# Altium PCB HLK-TX510_2.8_KIT_V1.1.PcbDoc (part 2 of 2)
Units mm, origin at the board's own origin, x right, y up, seen from the top; angles counter-clockwise.
Board outline 64 x 95.97 mm, 4 copper layers (Top Layer, GND, PWR, Bottom Layer), stack 0.537 mm thick; 97 components, 82 nets, 456 pads, 366 vias.
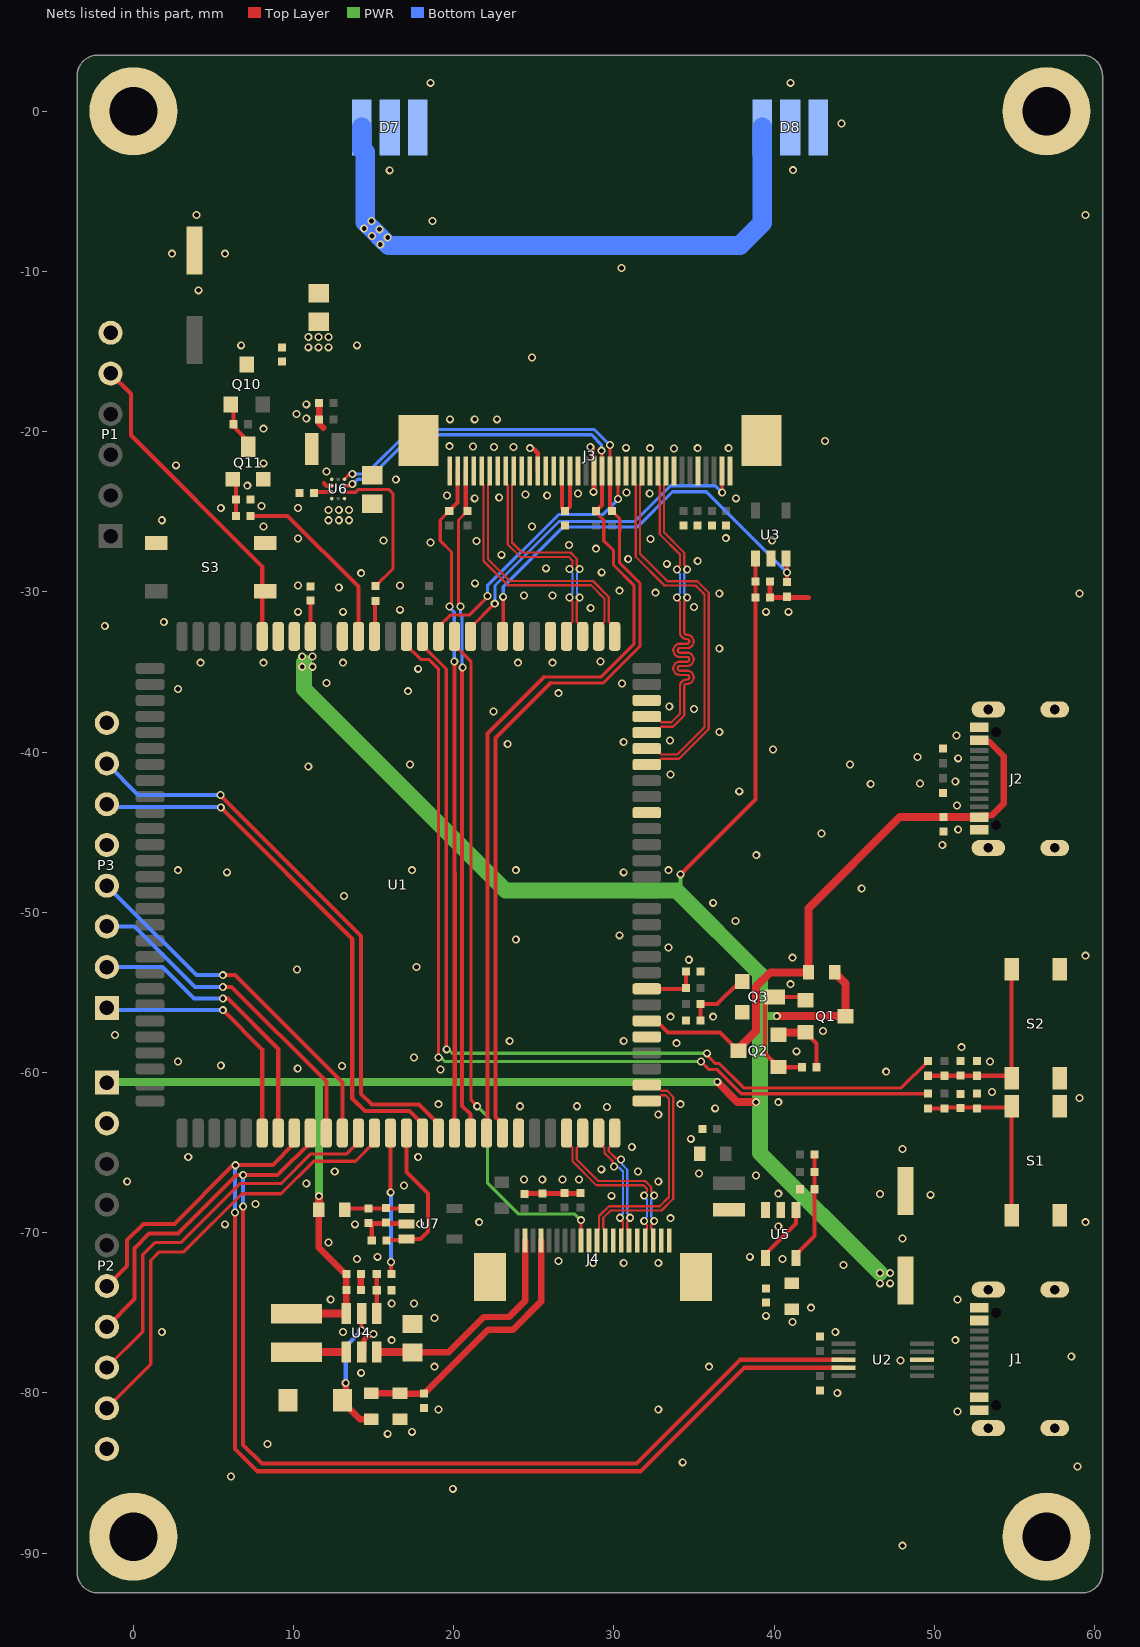
[diagram p4: the nets of this part, all layers, seen from the top]

## Via types
v1: diameter 0.5, hole 0.3, Top Layer to Bottom Layer, tented both sides, 366 vias

## Nets (pads, with @x,y where several pads share a name; then routed paths per layer and width w, separated by ;. In a path a pad name is that pad's centre, name@x,y a point inside that pad or via, vN(x,y) a via of type N, cw(c..) or ccw(c..) an arc to the next point about the centre after c; other vN are vias at no path point) (continued)
GND: C1.2 C2.1 C3.2 C4.2 C5.1 C6.2 C7.2 C8.2 C9.2 C10.2 C11.2 C12.2 C13.2 C14.2 C15.2 C16.2 C17.2 C18.2 C19.2 C20.2 C21.2 C22.2 C24.2 C25.2 C26.2 C27.2 C28.2 C29.2 C30.2 C31.2 C32.2 C33.2 D1.1 D2.1 D3.1 D4.1 D5.1 D7.0 D7.K D8.0 D8.K J1.1 J1.2 J1.3 J1.4 J1.A1B12 J1.B1A12 J2.1 J2.2 J2.3 J2.4 J2.A1B12 J2.B1A12 J3.1 J3.5 J3.8 J3.11 J3.14 J3.18 J3.20 J3.25 J3.26 J3.27 J3.30 J3.33 J3.36 J3.37 J3.38 J4.10 J4.13 J4.16 J4.19 J4.20 J4.21 J4.22 P1.6 P2.2 P2.10 P3.5 P3.8 pad.0 Q3.E Q11.E R5.1 R6.1 R10.2 R12.1 R13.2 R21.1 R26.1 R30.2 S1.2 S2.2 S3.1 U1.50 U1.61 U1.75 U1.82 U1.89 U1.91 U1.102 U1.106 U2.3 U3.2 U4.2 U5.2 U6.A1 U7.2 | length 18.7
  Top Layer w0.3: U4.2@14.25,-77.449 14.4,-77.299 14.4,-76.676 14.621,-76.454 14.732,-76.454 ; C17.2@14.681,-69.386 C17.2@14.71,-69.415 ; R26.1@14.884,-70.485 14.884,-69.589 C17.2@14.71,-69.415 ; U7.2@17.042,-69.444 17.013,-69.415 C17.2@14.71,-69.415 ; C32.2@24.409,-67.571 24.435,-67.546 C33.2@25.527,-67.546 27.889,-67.546 C26.2@27.915,-67.52 ; 25.015,-21.101 25.248,-21.334 J3.25@25.248,-22.453 ; v1@28.677,-20.98 28.677,-21.488 28.748,-21.559 J3.18@28.748,-22.453 28.748,-23.729 v1(28.727,-23.749) ; C8.2@39.736,-29.34 C7.2@39.736,-30.356 42.161,-30.356 42.164,-30.353
  Top Layer w0.4: C28.2@11.595,-18.215 C29.2@11.595,-19.231 11.595,-19.477 11.862,-19.744 ; C11.2@14.197,-73.587 C6.2@14.197,-72.571
  other v1: 48.006,-89.535 19.939,-85.979 6.096,-85.217 58.928,-84.582 34.29,-84.328 8.382,-83.185 15.875,-82.55 17.399,-82.423 51.435,-81.153 19.05,-81.026 32.766,-81.026 43.942,-80.01 14.224,-78.74 18.796,-78.359 35.941,-78.359 47.879,-77.978 58.547,-77.724 16.129,-76.708 51.308,-76.708 14.986,-76.327 1.778,-76.2 13.081,-76.2 43.815,-76.2 41.148,-75.565 18.796,-75.311 39.497,-75.184 42.291,-74.676 16.129,-74.422 17.526,-74.422 12.319,-74.168 51.435,-74.168 44.323,-72.009 28.702,-71.882 30.607,-71.882 32.766,-71.882 26.543,-71.755 13.97,-71.628 40.513,-71.628 15.24,-71.501 38.481,-71.501 12.192,-70.612 48.006,-70.358 40.259,-69.596 5.715,-69.469 13.843,-69.469 17.882,-69.444 21.59,-69.342 59.436,-69.342 33.528,-69.088 7.62,-68.199 29.845,-67.691 49.759,-67.63 46.609,-67.58 40.259,-67.564 16.891,-67.056 10.795,-66.929 -0.381,-66.802 32.766,-66.802 24.384,-66.675 25.527,-66.675 26.797,-66.675 27.813,-66.675 38.862,-66.421 35.306,-66.294 12.573,-66.167 31.496,-66.167 29.21,-66.04 3.429,-65.278 17.78,-65.278 48.006,-64.77 31.115,-64.643 34.798,-64.135 32.766,-62.611 36.322,-62.23 29.565,-62.143 24.13,-62.103 27.686,-62.103 19.05,-61.976 34.163,-61.976 40.259,-61.849 59.055,-61.595 53.594,-61.214 46.99,-59.944 19.177,-59.817 10.262,-59.741 13.03,-59.588 5.461,-59.563 2.794,-59.309 53.467,-59.309 17.526,-59.055 41.402,-58.674 51.689,-58.42 33.909,-58.166 23.495,-58.039 30.607,-58.039 -1.143,-57.658 43.053,-57.404 33.528,-56.515 36.195,-56.515 41.021,-54.483 10.211,-53.569 17.678,-53.416 34.671,-52.959 41.148,-52.832 59.436,-52.705 33.401,-52.197 23.876,-51.689 30.353,-51.435 37.592,-50.546 36.195,-49.403 13.157,-48.971 45.466,-48.514 5.842,-47.498 30.607,-47.498 2.794,-47.371 17.399,-47.371 23.876,-47.371 33.401,-47.371 38.887,-46.431 50.495,-45.796 42.951,-45.085 51.486,-44.831 51.41,-43.332 37.821,-42.443 46.025,-41.986 49.098,-41.961 51.308,-41.834 33.528,-41.402 10.922,-40.894 17.272,-40.767 44.729,-40.767 51.486,-40.386 48.946,-40.31 39.929,-39.827 23.368,-39.497 30.607,-39.37 33.503,-39.268 51.384,-38.964 36.576,-38.735 22.479,-37.465 35.001,-37.313 33.452,-37.16 26.543,-36.322 17.145,-36.195 2.794,-36.068 30.505,-35.712 12.065,-35.687 17.78,-34.798 4.191,-34.417 8.128,-34.417 13.081,-34.417 24.003,-34.417 26.162,-34.417 29.159,-34.341 36.576,-33.528 -1.778,-32.131 1.905,-31.877 10.287,-31.242 13.081,-31.242 39.497,-31.242 40.894,-31.242 16.637,-31.115 28.55,-31.013 35.001,-30.937 24.384,-30.226 26.162,-30.226 36.576,-30.099 59.055,-30.099 32.588,-30.048 30.353,-29.921 12.827,-29.718 10.287,-29.591 16.637,-29.591 21.336,-29.464 14.224,-28.829 29.235,-28.778 25.756,-28.524 33.299,-28.245 35.23,-28.067 30.886,-27.94 22.987,-27.686 28.88,-27.305 27.203,-27.076 18.542,-26.924 21.417,-26.817 15.621,-26.797 39.878,-26.797 32.283,-26.695 10.287,-26.67 36.982,-26.645 8.128,-25.908 24.892,-25.908 1.778,-25.527 5.461,-24.765 10.287,-24.765 8.001,-24.638 21.311,-24.155 37.617,-24.155 22.835,-24.105 19.583,-23.978 25.832,-23.978 24.486,-23.927 27.762,-23.851 32.233,-23.851 30.785,-23.8 7.112,-23.368 16.383,-22.987 12.065,-22.479 2.667,-22.098 8.128,-21.971 33.757,-21.057 24.765,-21.031 32.258,-21.031 35.23,-21.031 37.16,-21.031 30.759,-21.006 22.504,-20.955 23.724,-20.955 28.524,-20.955 21.209,-20.93 19.736,-20.904 43.18,-20.574 8.128,-19.812 19.761,-19.228 21.311,-19.228 22.708,-19.228 10.795,-19.177 10.185,-18.898 10.795,-18.288 24.892,-15.367 6.731,-14.605 13.97,-14.605 4.064,-11.176 30.48,-9.779 2.413,-8.89 5.715,-8.89 18.669,-6.858 3.937,-6.477 59.436,-6.477 16.002,-3.683 41.174,-3.678 44.196,-0.762 18.542,1.778 41.021,1.778
I2C0_SCL: J3.35 R25.2 U1.46 | length 42.2
  Top Layer w0.2: R25.2@19.716,-24.946 19.152,-25.51 19.152,-26.797 19.863,-27.508 v1@19.863,-30.861
  Top Layer w0.254: R25.2@19.716,-24.946 20.248,-24.414 J3.35@20.248,-22.453 ; v1(20.037,-34.341) 20.037,-47.535 20.062,-47.561 20.062,-60.66 20.037,-60.685 20.037,-63.766 U1.46@20.047,-63.776
  Bottom Layer w0.2: v1(19.736,-30.912) 19.736,-30.963 20.037,-31.263 v1(20.037,-34.341)
I2C0_SDA: J3.34 R24.2 U1.47 | length 41.9
  Top Layer w0.2: v1@20.295,-30.861 20.295,-25.51 R24.2@20.859,-24.946 ; v1@20.523,-34.823 20.594,-34.823 v1@20.634,-34.783
  Top Layer w0.254: v1@20.523,-34.823 20.523,-62.078 21.047,-62.601 U1.47@21.047,-63.776 ; J3.34@20.748,-22.453 20.748,-24.835 R24.2@20.859,-24.946
  Bottom Layer w0.2: v1@20.479,-30.969 v1(20.422,-30.912) 20.422,-31.483 20.523,-31.585 20.523,-34.691 v1(20.558,-34.727)
I2C1_SCL: J3.17 R23.2 U1.48 U6.B3 | length 67.6
  Top Layer w0.2: U6.B3@13.181,-23.374 13.566,-23.374 v1(13.67,-23.269) ; 25.637,-35.306 29.21,-35.306 31.242,-33.274 31.242,-29.591 29.972,-28.321 29.972,-27.407 29.368,-26.802 29.368,-25.523 28.872,-25.028 R23.2@28.872,-24.946 ; v1(29.215,-21.187) 29.248,-21.219 J3.17@29.248,-22.453
  Top Layer w0.254: U1.48@22.047,-63.776 22.094,-63.728 22.094,-38.849 25.637,-35.306 ; R23.2@28.872,-24.946 29.248,-24.57 J3.17@29.248,-22.453
  Bottom Layer w0.2: v1(13.67,-23.269) 13.71,-23.269 14.018,-22.961 14.669,-22.961 17.438,-20.193 28.603,-20.193 29.215,-20.806 v1(29.215,-21.187)
I2C1_SDA: J3.16 R22.2 U1.49 U6.A3 | length 67
  Top Layer w0.2: U6.A3@13.181,-22.974 13.521,-22.634 v1(13.67,-22.634) ; 26.039,-35.687 29.337,-35.687 31.623,-33.401 31.623,-29.464 30.353,-28.194 30.353,-26.212 30.357,-26.208 30.357,-25.512 30.353,-25.509 30.353,-25.423 R22.2@29.876,-24.946 ; J3.16@29.748,-22.453 J3.16@29.748,-22.453 v1(29.749,-20.831)
  Top Layer w0.254: U1.49@22.885,-63.068 22.606,-62.789 22.606,-39.124 26.039,-35.691 ; R22.2@29.748,-24.932 J3.16@29.748,-22.453
  Bottom Layer w0.2: v1(13.67,-22.634) 14.534,-22.634 17.306,-19.863 28.78,-19.863 v1(29.749,-20.831)
I2C3_SCL: P3.2 U1.35 | length 18.1
  Top Layer w0.254: v1(5.588,-55.38) 5.901,-55.38 9.047,-58.526 U1.35@9.047,-63.776
  Bottom Layer w0.254: P3.2@-1.651,-53.416 1.829,-53.416 3.793,-55.38 v1(5.588,-55.38)
I2C3_SDA: P3.1 U1.34 | length 15.9
  Top Layer w0.254: v1(5.588,-56.109) 8.047,-58.567 U1.34@8.047,-63.776
  Bottom Layer w0.254: P3.1@-1.651,-55.956 -1.499,-56.109 v1@5.537,-56.109
IR_RST: J3.15 U1.96 | length 17.3
  Top Layer w0.2: U1.96@19.047,-32.776 19.047,-32.185 19.786,-31.445 20.98,-31.445 22.098,-30.328 v1(22.098,-30.251) ; J3.15@30.248,-22.453 30.248,-24.2 v1(30.257,-24.209)
  Bottom Layer w0.2: v1(22.098,-30.251) 22.098,-29.614 26.541,-25.171 29.294,-25.171 v1(30.257,-24.209)
JTAG_NRST: P1.5 S3.2@8.226,-29.948 U1.107 | length 20.3
  Top Layer w0.254: P1.5@-1.417,-16.361 -0.147,-17.631 -0.147,-20.221 8.047,-28.415 8.047,-30.202 U1.107@8.047,-32.776
LCD_BL_EN: R9.1 U1.42 | length 8.8
  Top Layer w0.254: U1.42@16.047,-63.776 16.056,-63.785 16.056,-67.466 v1(16.066,-67.475) ; v1(16.078,-71.831) 16.093,-71.846 16.093,-72.555 R9.1@16.109,-72.571
  Bottom Layer w0.254: v1(16.066,-67.475) 16.072,-67.482 16.072,-71.825 v1(16.078,-71.831)
LCD_RESET: J4.9 U1.95 | length 43
  Top Layer w0.2: U1.95@20.047,-32.776 20.047,-33.331 21.082,-34.366 21.082,-61.722 v1(21.463,-62.103) ; v1(27.94,-69.215) 27.945,-69.22 27.945,-70.482 J4.9@27.95,-70.487
  PWR w0.2: v1(21.463,-62.103) 22.098,-62.738 22.098,-66.878 24.054,-68.834 27.559,-68.834 v1(27.94,-69.215)
LED+: C18.1 C19.1 J4.4 L1.1 | length 16.8
  Top Layer w0.4: L1.1@14.85,-80.014 C18.1@16.653,-80.014 ; C18.1@16.682,-80.043 C19.1@18.148,-80.043 22.143,-76.048 23.698,-76.048 25.451,-74.295 J4.4@25.451,-70.487
LED-: J4.2 R13.1 U4.3 | length 14.4
  Top Layer w0.4: R13.1@17.424,-77.47 19.66,-77.47 21.869,-75.26 23.444,-75.26 24.451,-74.254 J4.2@24.451,-70.487
  Top Layer w0.5: U4.3@15.2,-77.449 R13.1@17.424,-77.449
MIPI0_CLKN: J3.32 U1.86 | length 16.7
  Top Layer w0.14: J3.32@21.748,-22.453 21.748,-23.203 21.864,-23.319 21.864,-28.073 23.382,-29.591 28.575,-29.591 29.413,-30.429 29.413,-31.864 29.047,-32.23 U1.86@29.047,-32.776
MIPI0_CLKP: J3.31 U1.85 | length 16.7
  Top Layer w0.14: J3.31@22.225,-22.476 J3.31@22.248,-22.453 22.248,-23.203 22.131,-23.319 22.131,-27.963 23.492,-29.324 28.686,-29.324 29.68,-30.319 29.68,-31.864 30.047,-32.23 U1.85@30.047,-32.776
MIPI0_DATAN0: J3.29 U1.88 | length 14.3
  Top Layer w0.14: J3.29@23.248,-22.453 23.248,-23.203 23.364,-23.319 23.364,-27.033 24.144,-27.813 27.178,-27.813 27.413,-28.048 27.413,-28.313 27.233,-28.493 v1(27.233,-28.575) ; U1.88@27.047,-32.776 27.047,-32.23 27.413,-31.864 27.413,-30.63 27.233,-30.45 v1(27.233,-30.353)
  Bottom Layer w0.14: v1(27.233,-30.353) 27.233,-30.271 27.413,-30.091 27.413,-28.837 27.233,-28.657 v1(27.233,-28.575)
MIPI0_DATAP0: J3.28 U1.87 | length 14.3
  Top Layer w0.14: J3.28@23.748,-22.453 23.748,-23.203 23.631,-23.319 23.631,-26.923 24.254,-27.546 27.289,-27.546 27.68,-27.938 27.68,-28.313 27.86,-28.493 v1(27.86,-28.575) ; v1(27.86,-30.353) 27.86,-30.45 27.68,-30.63 27.68,-31.864 28.047,-32.23 U1.87@28.047,-32.776
  Bottom Layer w0.14: v1(27.86,-30.353) 27.86,-30.265 27.686,-30.091 27.686,-28.837 27.86,-28.663 v1(27.86,-28.575)
MIPI1_CLKN: J3.13 U1.79 | length 23.4
  Top Layer w0.14: J3.13@31.248,-22.453 31.248,-23.203 31.364,-23.319 31.364,-27.808 33.158,-29.602 35.088,-29.602 35.357,-29.87 35.649,-30.162 35.649,-38.443 33.95,-40.142 33.125,-40.142 32.959,-40.142 32.592,-39.776 U1.79@32.047,-39.776
MIPI1_CLKP: J3.12 U1.78 | length 23.8
  Top Layer w0.14: J3.12@31.748,-22.453 31.748,-23.203 31.631,-23.319 31.631,-27.618 33.348,-29.335 35.199,-29.335 35.731,-29.867 35.916,-30.052 35.916,-38.554 34.06,-40.409 33.235,-40.409 32.959,-40.409 32.592,-40.776 U1.78@32.047,-40.776
MIPI1_DATAN0: J3.10 U1.81 | length 22.2
  Top Layer w0.14: U1.81@32.047,-37.776 32.592,-37.776 32.959,-38.142 33.579,-38.142 34.125,-37.596 34.125,-36.651 34.125,-35.888 cw(c34.538,-35.888) 34.538,-35.475 34.563,-35.475 ccw(c34.563,-35.328) 34.563,-35.182 34.119,-35.182 cw(c34.119,-34.769) 34.119,-34.356 34.563,-34.356 ccw(c34.563,-34.21) 34.563,-34.063 34.119,-34.063 cw(c34.119,-33.65) 34.119,-33.237 34.563,-33.237 ccw(c34.563,-33.091) 34.563,-32.945 34.538,-32.945 cw(c34.538,-32.531) 34.125,-32.531 34.125,-31.237 34.125,-30.615 33.945,-30.435 v1(33.945,-30.353) ; J3.10@32.748,-22.453 32.748,-23.203 32.864,-23.319 32.864,-26.402 34.125,-27.663 34.125,-28.323 33.945,-28.503 v1(33.945,-28.6)
  Bottom Layer w0.14: v1(33.945,-30.353) 33.945,-30.271 34.125,-30.091 34.125,-28.862 33.945,-28.682 v1(33.945,-28.6)
MIPI1_DATAP0: J3.9 U1.80 | length 22.8
  Top Layer w0.14: U1.80@32.047,-38.776 32.592,-38.776 32.959,-38.409 33.689,-38.409 34.392,-37.707 34.392,-36.651 34.392,-35.888 cw(c34.538,-35.888) 34.538,-35.742 34.563,-35.742 ccw(c34.563,-35.328) 34.563,-34.915 34.119,-34.915 cw(c34.119,-34.769) 34.119,-34.623 34.563,-34.623 ccw(c34.563,-34.21) 34.563,-33.796 34.119,-33.796 cw(c34.119,-33.65) 34.119,-33.504 34.563,-33.504 ccw(c34.563,-33.091) 34.563,-32.678 34.538,-32.678 cw(c34.538,-32.531) 34.392,-32.531 34.392,-31.237 34.392,-30.615 34.572,-30.435 v1(34.572,-30.353) ; J3.9@33.168,-22.533 J3.9@33.248,-22.453 33.248,-23.203 33.131,-23.319 33.131,-26.291 34.392,-27.552 34.392,-28.323 34.572,-28.503 v1(34.572,-28.6)
  Bottom Layer w0.14: v1(34.572,-30.353) 34.572,-30.271 34.392,-30.091 34.392,-28.862 34.572,-28.682 v1(34.572,-28.6)
MIPI3_CLKN: J4.15 U1.56 | length 7.7
  Top Layer w0.14: U1.56@30.047,-63.776 30.047,-64.321 29.68,-64.688 29.68,-64.913 30.128,-65.361 30.383,-65.361 v1(30.441,-65.419) ; J4.15@30.947,-70.488 30.947,-69.888 30.833,-69.774 30.833,-69.325 31.012,-69.145 v1(31.012,-69.063)
  Bottom Layer w0.14: v1(30.441,-65.419) 30.499,-65.477 30.499,-65.731 30.832,-66.065 30.832,-68.801 31.012,-68.981 v1(31.012,-69.063)
MIPI3_CLKP: J4.14 U1.55 | length 7.7
  Top Layer w0.14: U1.55@29.047,-63.776 29.047,-64.321 29.413,-64.688 29.413,-65.023 29.68,-65.29 29.939,-65.55 29.939,-65.804 v1(29.997,-65.862) ; v1(30.385,-69.063) 30.385,-69.145 30.566,-69.325 30.566,-69.772 30.451,-69.887 J4.14@30.451,-70.487
  Bottom Layer w0.14: v1(29.997,-65.862) 30.055,-65.92 30.31,-65.92 30.565,-66.176 30.565,-68.801 30.385,-68.981 v1(30.385,-69.063)
MIPI3_DATAN0: J4.18 U1.54 | length 10.9
  Top Layer w0.14: U1.54@28.047,-63.776 28.047,-64.321 27.68,-64.688 27.68,-64.854 27.68,-65.43 29.013,-66.764 31.949,-66.764 32.334,-67.149 32.334,-67.404 32.514,-67.584 v1(32.514,-67.666) ; J4.18@32.45,-70.487 32.45,-69.887 32.334,-69.771 32.334,-69.527 32.514,-69.347 v1(32.514,-69.266)
  Bottom Layer w0.14: v1(32.514,-69.266) 32.514,-69.184 32.334,-69.004 32.334,-67.928 32.514,-67.748 v1(32.514,-67.666)
MIPI3_DATAN1: J4.12 U1.58 | length 14.7
  Top Layer w0.14: J4.12@29.451,-70.487 29.451,-69.887 29.334,-69.77 29.334,-69.069 29.797,-68.605 32.973,-68.605 33.706,-67.872 33.706,-61.519 33.329,-61.142 32.959,-61.142 32.592,-60.776 U1.58@32.047,-60.776
MIPI3_DATAP0: J4.17 U1.53 | length 10.9
  Top Layer w0.14: U1.53@27.047,-63.776 27.047,-64.321 27.413,-64.688 27.413,-64.964 27.413,-65.541 28.903,-67.031 31.838,-67.031 32.067,-67.259 32.067,-67.404 31.887,-67.584 v1(31.887,-67.666) ; v1(31.887,-69.266) 31.887,-69.346 32.067,-69.526 32.067,-69.77 31.95,-69.886 J4.17@31.95,-70.486
  Bottom Layer w0.14: v1(31.887,-69.266) 31.887,-69.184 32.067,-69.004 32.067,-67.928 31.887,-67.748 v1(31.887,-67.666)
MIPI3_DATAP1: J4.11 U1.57 | length 14.2
  Top Layer w0.14: J4.11@28.951,-70.487 28.951,-69.887 29.067,-69.77 29.067,-68.958 29.687,-68.338 32.862,-68.338 33.439,-67.762 33.439,-61.629 33.218,-61.409 32.959,-61.409 32.592,-61.776 U1.57@32.047,-61.776
NetC3_1: C3.1 D1.2 R4.2 R18.1 S1.1 | length 12
  Top Layer w0.254: R4.2@49.611,-62.233 R18.1@50.627,-62.233 ; R18.1@50.627,-62.182 54.747,-62.182 S1.1@54.816,-62.113 S1.1@54.816,-68.913
NetC4_1: C4.1 D2.2 R11.2 R19.1 S2.1 | length 12.1
  Top Layer w0.254: R11.2@49.611,-60.201 R19.1@50.627,-60.201 D2.2@52.659,-60.201 54.656,-60.201 S2.1@54.816,-60.362 S2.1@54.816,-53.562
NetC17_1: C17.1 C31.1 L5.1 U7.1 | length 3.9
  Top Layer w0.254: L5.1@13.208,-68.555 13.269,-68.494 U7.1@17.042,-68.494
NetC23_1: C23.1 R8.1 R10.1 U5.5 | length 6.9
  Top Layer w0.254: U5.5@41.362,-71.579 41.362,-71.354 42.52,-70.195 R10.1@42.52,-67.285 R8.1@42.52,-65.126
NetC30_1: C30.1 U6.C1 | length 1.1
  Top Layer w0.254: C30.1@11.276,-23.774 U6.C1@12.381,-23.774
NetD6_1: D6.1 L2.2 U4.1 | length 3.1
  Top Layer w0.3: D6.1@9.642,-80.454 D6.1@9.654,-80.442
  Top Layer w0.5: L2.2@10.191,-77.454 10.196,-77.449 U4.1@13.3,-77.449
NetD6_2: D6.2 L1.2 U4.5 | length 8.2
  Top Layer w0.254: v1(14.241,-76.09) 14.245,-76.085 14.245,-75.053 U4.5@14.25,-75.049
  Top Layer w0.4: v1(13.259,-79.375) 13.259,-80.237 D6.2@13.054,-80.442 13.054,-80.542 14.144,-81.632 L1.2@14.602,-81.632 ; L1.2@14.691,-81.48 L1.2@14.846,-81.636
  Bottom Layer w0.254: v1(13.259,-79.375) 13.259,-77.09 14.241,-76.108 v1(14.241,-76.09)
NetD7_A: D7.A D8.A R14.2 | length 38
  Bottom Layer w1.2: D7.A@14.258,-1 14.258,-2.336 14.478,-2.556 14.478,-6.925 15.112,-7.559 15.494,-7.94 15.643,-8.09 15.651,-8.098 15.844,-8.291 15.935,-8.382 37.846,-8.382 39.25,-6.978 D8.A@39.25,-1
  other v1: 15.417,-8.316 15.875,-7.874 14.889,-7.782 15.367,-7.366 14.412,-7.308 14.859,-6.858
NetL3_1: L3.1 U5.3
NetL4_2: L4.2 U6.B1 | length 0.6
  Top Layer w0.254: 11.892,-23.219 12.048,-23.374 U6.B1@12.381,-23.374
NetQ1_1: Q1.1 Q2.1 Q3.C R1.1 | length 8.6
  Top Layer w0.254: Q2.1@40.27,-59.652 Q2.1@40.286,-59.668 ; R1.1@41.737,-59.668 Q2.1@40.286,-59.668 ; Q1.1@41.961,-55.493 41.754,-55.286 Q3.C@40.036,-55.286 39.896,-55.286 39.426,-55.756 39.426,-58.808 Q2.1@40.286,-59.668
NetQ1_2: Q1.2 Q2.2 R1.2 | length 4.2
  Top Layer w0.254: Q1.2@41.961,-57.493 42.652,-58.184 R1.2@42.652,-59.668
  Top Layer w0.5: Q2.2@40.27,-57.652 40.429,-57.493 Q1.2@41.961,-57.493
NetQ3_B: Q3.B R3.1 R6.2 | length 4.2
  Top Layer w0.254: R6.2@35.413,-56.747 R3.1@35.413,-55.731 36.446,-55.731 37.856,-54.321 Q3.B@38.004,-54.321
NetQ10_1: Q10.1 Q11.C R28.1 | length 3
  Top Layer w0.254: Q10.1@6.092,-18.296 6.254,-18.458 R28.1@6.254,-19.459 ; R28.1@6.254,-19.536 6.254,-19.688 7.181,-20.615 Q11.C@7.181,-20.933
NetQ11_B: Q11.B R29.1 R30.1 | length 2.4
  Top Layer w0.254: Q11.B@6.216,-22.965 6.406,-23.155 R29.1@6.406,-25.251
NetR9_2: R9.2 R12.2 U4.4 | length 2.5
  Top Layer w0.254: R9.2@15.194,-72.571 R12.2@15.194,-73.587 15.194,-75.044 U4.4@15.2,-75.049
NetR14_1: R14.1 R16.1 U6.D1 U6.D3
  other v1: 12.192,-25.527 12.827,-25.527 13.462,-25.527 12.192,-24.892 12.827,-24.892 13.462,-24.892 10.922,-14.732 11.557,-14.732 12.192,-14.732 10.922,-14.097 11.557,-14.097 12.192,-14.097
NetR20_2: R20.2 U6.C3 | length 9.4
  Top Layer w0.2: U6.C3@13.181,-23.774 13.877,-23.774 14.052,-23.599 15.931,-23.599 16.21,-23.879 16.21,-28.544 R20.2@15.113,-29.642
RGB_PWRDN: R29.2 U1.101 | length 11.7
  Top Layer w0.254: R29.2@7.32,-25.251 9.63,-25.251 14.047,-29.668 U1.101@14.047,-32.776
RGB_RST: J3.2 U1.94 | length 22.1
  Top Layer w0.2: U1.94@21.047,-32.776 21.047,-32.226 22.538,-30.734 v1(22.559,-30.734) ; v1@36.748,-23.803 J3.2@36.748,-22.453
  Bottom Layer w0.2: v1(22.559,-30.734) 22.575,-30.718 22.575,-29.6 26.571,-25.603 31.293,-25.603 33.528,-23.368 36.313,-23.368 v1@36.748,-23.803
  other v1: 36.759,-23.803
STROBE: R20.1 U1.100 | length 2.2
  Top Layer w0.254: U1.100@15.047,-32.776 15.08,-32.742 15.08,-30.589 R20.1@15.113,-30.556
SW1: R4.1 U1.98 | length 58.9
  Top Layer w0.2: U1.98@17.047,-32.776 17.047,-33.326 17.935,-34.214 18.44,-34.214 19.055,-34.829 v1@19.055,-59.055 ; v1(19.05,-59.055) v1@19.053,-59.052 ; v1(35.433,-59.309) 35.941,-59.817 36.449,-59.817 37.951,-61.319 R4.1@49.611,-61.319
  PWR w0.2: v1@19.177,-59.055 19.431,-59.309 v1(35.433,-59.309)
  Bottom Layer w0.2: v1(19.05,-59.055) v1@19.177,-59.055
SW2: R11.1 U1.97 | length 58.2
  Top Layer w0.2: U1.97@18.047,-32.776 18.047,-33.326 19.533,-34.812 19.533,-58.522 v1(19.558,-58.547) ; v1(35.814,-58.801) 35.814,-58.928 36.322,-59.436 36.576,-59.436 38.1,-60.96 47.938,-60.96 R11.1@49.611,-59.287
  PWR w0.2: v1@19.639,-58.547 19.893,-58.801 v1(35.814,-58.801)
  Bottom Layer w0.2: v1(19.558,-58.547) v1@19.639,-58.547
UART0_RXD: P3.7 U1.45 | length 36.4
  Top Layer w0.254: v1(5.436,-42.672) 5.436,-42.697 14.224,-51.486 14.224,-61.341 14.884,-62.001 17.822,-62.001 19.047,-63.226 U1.45@19.047,-63.776
  Bottom Layer w0.254: P3.7@-1.651,-40.716 0.305,-42.672 v1(5.436,-42.672)
UART0_TXD: P3.6 U1.44 | length 34.4
  Top Layer w0.254: v1(5.461,-43.459) 13.665,-51.664 13.665,-61.62 14.453,-62.408 17.229,-62.408 18.047,-63.226 U1.44@18.047,-63.776
  Bottom Layer w0.254: P3.6@-1.651,-43.256 -1.495,-43.412 5.414,-43.412 v1(5.461,-43.459)
UART1_RXD: P3.4 U1.39 | length 22.9
  Top Layer w0.254: v1(5.588,-53.924) 6.35,-53.924 13.047,-60.621 U1.39@13.047,-63.776
  Bottom Layer w0.254: P3.4@-1.651,-48.336 -0.762,-49.225 3.937,-53.924 v1(5.588,-53.924)
UART1_TXD: P3.3 U1.38 | length 20.9
  Top Layer w0.254: v1(5.588,-54.652) 6.138,-54.652 12.047,-60.561 U1.38@12.047,-63.776
  Bottom Layer w0.254: P3.3@-1.651,-50.876 0.076,-50.876 3.852,-54.652 v1(5.588,-54.652)
USB_ID: R2.1 R5.2 U1.64 | length 3.5
  Top Layer w0.254: U1.64@32.047,-54.776 34.437,-54.776 R2.1@34.498,-54.715 R5.2@34.498,-53.699
USI0_SCLK: P2.9 U1.41 | length 27.9
  Top Layer w0.2: P2.9@-1.651,-80.95 1.092,-78.207 1.092,-71.73 1.626,-71.196 3.15,-71.196 6.782,-67.564 9.22,-67.564 11.252,-65.532 13.868,-65.532 15.047,-64.354 U1.41@15.047,-63.776
USI0_SD0: P2.8 U1.40 | length 24.9
  Top Layer w0.2: P2.8@-1.651,-78.41 0.584,-76.175 0.584,-71.374 1.346,-70.612 2.972,-70.612 6.655,-66.929 9.22,-66.929 11.074,-65.075 13.31,-65.075 14.047,-64.338 U1.40@14.047,-63.776
USI1_SCLK: P2.7 U1.37 U2.8 | length 77.4
  Top Layer w0.254: P2.7@-1.651,-75.87 0.076,-74.143 0.076,-70.968 0.991,-70.053 2.794,-70.053 6.452,-66.396 v1(6.858,-66.396) 9.003,-66.396 11.047,-64.352 U1.37@11.047,-63.776 ; v1(6.858,-68.351) 6.858,-83.236 8.026,-84.404 31.394,-84.404 37.871,-77.927 U2.8@44.336,-77.927
  Bottom Layer w0.254: v1(6.858,-68.351) v1(6.858,-66.396)
USI1_SD0: P2.6 U1.36 U2.9 | length 75.2
  Top Layer w0.254: P2.6@-1.651,-73.33 -0.381,-72.06 -0.381,-70.46 0.635,-69.444 2.565,-69.444 v1@6.229,-65.78 ; v1(6.35,-68.732) 6.35,-83.49 7.747,-84.887 31.648,-84.887 38.108,-78.427 U2.9@44.336,-78.427 ; v1@6.375,-65.761 8.712,-65.761 10.008,-64.465 U1.36@10.008,-64.287
  Bottom Layer w0.254: v1(6.35,-68.732) 6.354,-68.728 6.354,-65.807 v1(6.375,-65.786)
VBUS: C1.1 C2.2 C6.1 C7.1 C8.1 C11.1 C21.1 C22.1 J1.A4B9 J1.B4A9 L2.1 L5.2 P2.1 Q1.3 R7.1 U1.104 U1.105 U3.1 U4.6 U5.1 U5.4 | length 157.4
  Top Layer w0.254: U1.104@11.047,-32.776 11.048,-32.774 C2.2@11.049,-30.549 C2.2@11.049,-30.549 ; v1(34.163,-47.625) 38.836,-42.952 C7.1@38.836,-30.356 38.844,-30.348 38.844,-29.34 U3.1@38.844,-27.919 ; U5.4@39.599,-71.196 41.362,-69.433 U5.1@41.362,-68.579
  Top Layer w0.3: C6.1@13.297,-72.571 13.297,-72.631 C11.1@13.297,-73.587 13.297,-75.046 U4.6@13.3,-75.049
  Top Layer w0.4: L5.2@11.582,-68.555 11.582,-70.917 13.297,-72.631 13.3,-72.634 U4.6@13.3,-75.049
  Top Layer w0.5: L2.1@10.191,-75.054 13.295,-75.054 U4.6@13.3,-75.049 ; L5.2@11.582,-68.555 v1(11.582,-67.716) ; v1(36.449,-60.579) 37.719,-61.849 v1(38.862,-61.849) ; v1(40.163,-56.48) 44.376,-56.48 44.425,-56.529 Q1.3@44.461,-56.493 44.461,-54.441 R7.1@43.769,-53.749
  PWR w0.254: 34.163,-48.387 v1(34.163,-47.625)
  PWR w0.5: P2.1@-1.651,-60.63 -1.6,-60.579 11.557,-60.579 ; v1(11.582,-67.716) 11.582,-60.604 11.557,-60.579 ; v1(36.449,-60.579) 11.557,-60.579 ; 39.208,-56.48 v1(40.163,-56.48)
  PWR w1: 10.668,-34.417 10.668,-36.068 23.241,-48.641 33.909,-48.641 39.116,-53.848 39.116,-56.388 39.116,-65.024 v1(46.609,-72.517)
  other v1: 46.609,-73.152 47.244,-73.152 47.244,-72.517 10.541,-34.671 11.176,-34.671 10.541,-34.036 11.176,-34.036
VBUS_HOST: D5.2 J2.A4B9 J2.B4A9 Q2.3 R7.2 U1.62 | length 38.4
  Top Layer w0.254: U1.62@32.047,-56.776 32.648,-56.776 33.381,-57.509 36.627,-57.509 Q2.3@37.77,-58.652
  Top Layer w0.4: J2.A4B9@52.793,-44.056 52.893,-43.956 53.58,-43.956 54.331,-43.205 54.331,-40.257 53.43,-39.356 52.893,-39.356 J2.B4A9@52.793,-39.256
  Top Layer w0.5: Q2.3@37.77,-58.652 37.77,-58.505 38.867,-57.407 38.867,-54.638 39.756,-53.749 R7.2@42.144,-53.749 42.144,-49.753 47.841,-44.056 50.571,-44.056 J2.A4B9@52.793,-44.056
VDD_2.8V_EN: R21.2 U1.92 U3.3 | length 26.9
  Top Layer w0.2: U1.92@23.047,-32.776 23.089,-32.734 v1(23.089,-30.302)
  Top Layer w0.254: U3.3@40.744,-27.919 40.798,-27.972 R21.2@40.798,-29.391
  Bottom Layer w0.2: v1(23.089,-30.302) 23.089,-29.667 26.803,-25.953 31.451,-25.953 33.655,-23.749 35.765,-23.749 v1(40.798,-28.781)
VDD_IR_3V3: J3.23 J3.24 R16.2
VDD_LCD_EN: R26.2 U1.43 U7.3 | length 9.5
  Top Layer w0.254: R26.2@15.799,-70.485 15.844,-70.439 16.996,-70.439 U7.3@17.042,-70.394 17.922,-70.394 18.39,-69.926 18.39,-67.539 17.047,-66.196 U1.43@17.047,-63.776
VDD_RGB_3V3: C14.1 C15.1 J3.21 J3.22 Q10.3 | length 5.2
  Top Layer w0.254: J3.22@26.748,-22.453 26.748,-24.746 C15.1@26.955,-24.953 27.248,-24.66 J3.21@27.248,-22.453
pads on no net: J1. J1.A5 J1.A8 J1.B5 J1.B8 J2. J2.A5 J2.A8 J2.B5 J2.B8 J4.1 J4.3 J4.5 J4.8 S3.2@1.426,-29.948 U1.1 U1.2 U1.3 U1.4 U1.5 U1.6 U1.7 U1.8 U1.9 U1.10 U1.11 U1.12 U1.13 U1.14 U1.15 U1.16 U1.17 U1.18 U1.19 U1.20 U1.21 U1.22 U1.23 U1.24 U1.25 U1.26 U1.27 U1.28 U1.29 U1.51 U1.52 U1.59 U1.60 U1.67 U1.68 U1.69 U1.70 U1.71 U1.72 U1.73 U1.74 U1.76 U1.77 U1.83 U1.84 U1.99 U1.110 U1.111 U1.112 U2.4 U2.5 U2.6 U3.4 U6.D2 U7.4

## Polygon pours and split planes (outlines as drawn)
GND on Top Layer "Layer 3-No Net" (solid, remove dead copper, pour order 0): -5.684,4.823 -4.541,5.966 64.166,5.966 64.166,-92.713 60.483,-96.396 60.356,-96.523 -6.827,-96.523 -6.827,-89.665 -6.192,-89.03
GND on Bottom Layer "Layer 3-No Net" (solid, remove dead copper, pour order 2): -10.129,8.887 -8.859,7.617 70.77,7.617 70.77,-88.141 60.864,-98.047 -9.367,-98.047
GND on GND "Layer 3-No Net" (solid, remove dead copper, pour order 3): -10.287,7.112 -10.033,6.858 67.31,6.858 67.31,-95.123 61.976,-100.457 60.198,-98.679 -10.795,-98.679 -10.795,-96.647
GND on PWR "Layer 3-No Net" (solid, remove dead copper, pour order 4): -11.684,4.953 67.183,4.953 64.77,2.54 64.77,-99.187 -7.62,-99.187 -8.763,-98.044 -9.37,-98.044 -9.367,-98.047

## Keep-outs
Keep-Out Layer:
  circle w0.254: c53.023,-22.747 r0.5
  circle w0.254: c53.023,-90.997 r0.5
  circle w0.254: c3.973,-90.997 r0.5
  circle w0.254: c3.973,-22.747 r0.5
  circle w0.127: c11.75,-3.6 r1.75
  circle w0.127: c45.25,-3.6 r1.75
  lines w0.2: -3.5,-91.202 -3.502,-91.202 ; -3.502,-91.202 ccw(c-2.232,-91.202) -2.232,-92.472 59.228,-92.472 ccw(c59.228,-91.202) 60.498,-91.202 60.498,2.23 ccw(c59.228,2.23) 59.228,3.5 -2.232,3.5 ccw(c-2.232,2.23) -3.502,2.23 -3.502,-91.202 ; 15.258,-14.433 41.748,-14.433 41.748,-11.433 15.258,-11.433 15.258,-14.433 ; 22.2,-80.003 34.8,-80.003 34.8,-77.003 22.2,-77.003 22.2,-80.003 ; 35.4,-88.878 44.455,-88.878 44.455,-82.248 35.4,-82.248 35.4,-88.878
  lines w1: 8.3,-7.5 8.3,-1.25 ; 48.7,-7.5 48.7,-1.25
  lines w2: 20.5,1.346 36.5,1.346

## Other copper
Top Layer:
  region net NetD7_A: 12.319,-12.065 16.129,-8.255 16.129,-7.62 15.113,-6.604 14.554,-6.604 10.668,-10.49 10.668,-11.938 10.795,-12.065
  region net NetR14_1: 10.795,-14.986 12.319,-14.986 12.446,-14.859 12.446,-12.573 12.319,-12.446 10.795,-12.446 10.668,-12.573 10.668,-14.859
  region net VBUS: 9.779,-31.75 11.43,-31.75 11.557,-31.877 11.557,-34.798 11.303,-35.052 10.033,-35.052 9.652,-34.671 9.652,-31.877
  region net VBUS: 39.014,-70.942 39.802,-70.942 39.903,-71.044 39.903,-72.034 40.437,-72.568 45.822,-72.568 47.117,-71.272 49.047,-71.272 49.911,-72.136 49.911,-73.457 51.595,-75.128 52.395,-75.128 52.451,-75.184 52.451,-75.667 52.278,-75.839 52.024,-75.839 51.765,-76.098 48.133,-76.098 45.885,-73.85 39.078,-73.851 38.913,-73.685 38.913,-71.044
  region net NetL3_1: 36.201,-67.945 39.776,-67.945 39.853,-68.021 39.853,-69.215 39.802,-69.266 36.155,-69.266 36.038,-69.149 36.043,-68.072
  region net NetD6_1: 8.434,-76.682 13.614,-76.683 13.691,-76.759 13.691,-78.13 10.566,-81.255 8.763,-81.255 8.331,-80.823 8.331,-76.784
  region net VBUS: 53.343,-80.614 53.648,-80.31 53.953,-80.31 55.121,-79.141 55.121,-76.601 53.978,-75.458 53.699,-75.458 53.368,-75.128 52.149,-75.128 52.073,-75.204 52.073,-75.788 52.124,-75.839 53.419,-75.839 53.546,-75.966 53.546,-76.525 54.181,-77.16 54.181,-78.659 53.495,-79.344 53.495,-79.827 53.419,-79.903 52.124,-79.903 52.098,-79.929 52.098,-80.564 52.149,-80.614
  region net NetR14_1: 12.502,-24.031 12.527,-24.057 12.527,-24.26 12.68,-24.412 12.883,-24.412 13.035,-24.26 13.035,-24.057 13.061,-24.031 14.026,-24.031 14.204,-23.854 15.753,-23.854 15.804,-23.904 15.804,-25.522 15.494,-25.832 11.989,-25.832 11.892,-25.735 11.892,-24.195 12.056,-24.031
  region net NetL4_2: 10.581,-19.957 11.613,-19.957 11.613,-22.711 12.273,-23.371 12.273,-23.447 12.223,-23.498 11.867,-23.498 11.638,-23.269 10.876,-23.269 10.47,-22.863 10.47,-20.069
  region net 3V3_VDD: 12.68,-23.142 12.883,-23.142 12.934,-23.092 12.934,-22.634 13.594,-21.974 13.594,-17.758 12.192,-17.758 12.192,-20.089 12.299,-20.196 12.299,-22.078 12.629,-22.408 12.629,-23.092
  region net VDD_IR_3V3: 25.558,-23.422 26.421,-23.422 26.447,-23.396 26.447,-19.891 23.399,-16.843 14.864,-16.843 14.077,-17.631 14.077,-23.244 14.153,-23.32 15.702,-23.32 15.804,-23.219 15.804,-19.078 16.287,-18.596 22.916,-18.596 25.558,-21.237
  region net VDD_RGB_3V3: 26.574,-23.396 27.412,-23.396 27.437,-23.371 27.437,-18.748 23.907,-15.218 6.558,-15.218 6.406,-15.37 6.406,-16.335 6.609,-16.538 23.526,-16.538 26.574,-19.586
  region net 3V3_VDD: 7.193,-18.875 7.193,-17.453 7.854,-16.792 12.807,-16.792 13.594,-17.58 13.594,-18.266 12.192,-18.266 12.192,-18.032 11.867,-17.707 10.741,-17.707 9.395,-19.053 7.295,-19.053 7.19,-18.948
  region net 3V3_VDD: 2.774,-15.903 4.45,-17.58 7.447,-17.58 7.854,-17.173 7.854,-16.792 6.533,-16.792 5.796,-16.056 5.796,-12.449 5.492,-12.144 3.028,-12.144 2.774,-12.398
  region net 3V3_VDD: 38.313,-67.488 36.038,-67.488 35.992,-67.442 35.992,-63.322 37.033,-62.281 38.075,-62.281 38.313,-62.519
PWR:
  pour cut-out: 9.398,-33.782 10.287,-33.782 10.287,-33.906 10.157,-34.036 10.105,-33.984 9.515,-33.984
  region net NetR14_1: 11.176,-14.986 12.319,-14.986 12.446,-14.859 12.446,-13.97 12.319,-13.843 10.709,-13.843 10.636,-13.916 10.668,-13.948 10.668,-14.91 11.303,-15.545 11.303,-20.066 10.668,-20.701 10.668,-24.404 12.094,-25.83 13.588,-25.83 13.767,-25.651 13.767,-24.723 11.684,-22.64 11.684,-21.463 12.446,-20.701 12.446,-14.859
  region net VBUS: 47.498,-72.136 47.625,-72.263 47.625,-73.33 47.478,-73.477 46.398,-73.477 46.228,-73.308 46.228,-72.263 46.355,-72.136
  region net 3V3_VDD: 38.125,-64.237 38.278,-64.084 38.278,-62.484 38.075,-62.281 37.186,-62.281 37.008,-62.459 37.008,-64.059 37.186,-64.237
  region net 3V3_VDD: 9.703,-16.815 9.855,-16.967 9.855,-18.517 9.652,-18.72 8.738,-18.72 8.585,-18.567 8.585,-16.942 8.712,-16.815
  region net VBUS: 10.414,-33.655 11.303,-33.655 11.557,-33.909 11.557,-34.798 11.049,-35.306 10.287,-35.306 10.16,-35.179 10.16,-33.909

## Silkscreen, mask and mechanical layers (free items; w line width, h text height)
Top Overlay:
  text "2022.08.27" at 21.387,-5.182 h3
  text "HLK_TX510_2.8_KIT_V1.1" at 12.827,-9.144 h3
  text "GND" at 0.127,-15.621 h1
  text "NRST" at 0.127,-16.891 h1
  text "804_TMS" at 0,-19.304 h1
  text "804_TCK" at 0,-21.867 h1
  text "805_TMS" at 0,-24.257 h1
  text "805_TCK" at 0,-25.781 h1
  text "+5V" at 0,-65.151 h1
  text "GND" at 0,-66.167 h1
  text "AGPIO0" at 0,-67.31 h1
  text "805_RX" at 0,-68.659 h1
  text "805_TX" at 0,-70.968 h1
  text "USI1_SD0" at 0,-73.66 h1
  text "USI1_SCLK" at 0,-76.073 h1
  text "USI0_SD0" at 0,-78.74 h1
  text "USI0_SCLK" at 0,-81.28 h1
  text "GND" at 0,-83.947 h1
Bottom Overlay:
  circle w0.2: c24.356,-1.236 r4
  circle w0.2: c24.356,-1.236 r3.5
  circle w0.2: c32.856,-1.236 r4
  circle w0.2: c32.856,-1.236 r3.5
  lines w0.2: 3.498,-91.345 3.498,-22.145 53.498,-22.145 53.498,-91.345 3.498,-91.345 ; 8.25,-10 48.75,-10 48.75,1.5 8.25,1.5 8.25,-10
  text "GND" at 1.778,-38.608 h1
  text "UART0_RXD" at 5.08,-41.148 h1
  text "UART0_TXD" at 5.039,-43.546 h1
  text "GND" at 1.778,-46.228 h1
  text "UART1_RXD" at 5.08,-48.895 h1
  text "UART1_TXD" at 5.08,-51.181 h1
  text "I2C3_SCL" at 3.937,-53.721 h1
  text "I2C3_SDA" at 3.937,-56.261 h1